# Altium PCB 智能语音风扇.PcbDoc
Units mm, origin at the board's own origin, x right, y up, seen from the top; angles counter-clockwise.
Board outline 242.7 x 171.7 mm, 2 copper layers (Top Layer, Bottom Layer); 25 components, 41 nets, 117 pads, 0 vias.
Unrouted connection lines stored in the file: 61.
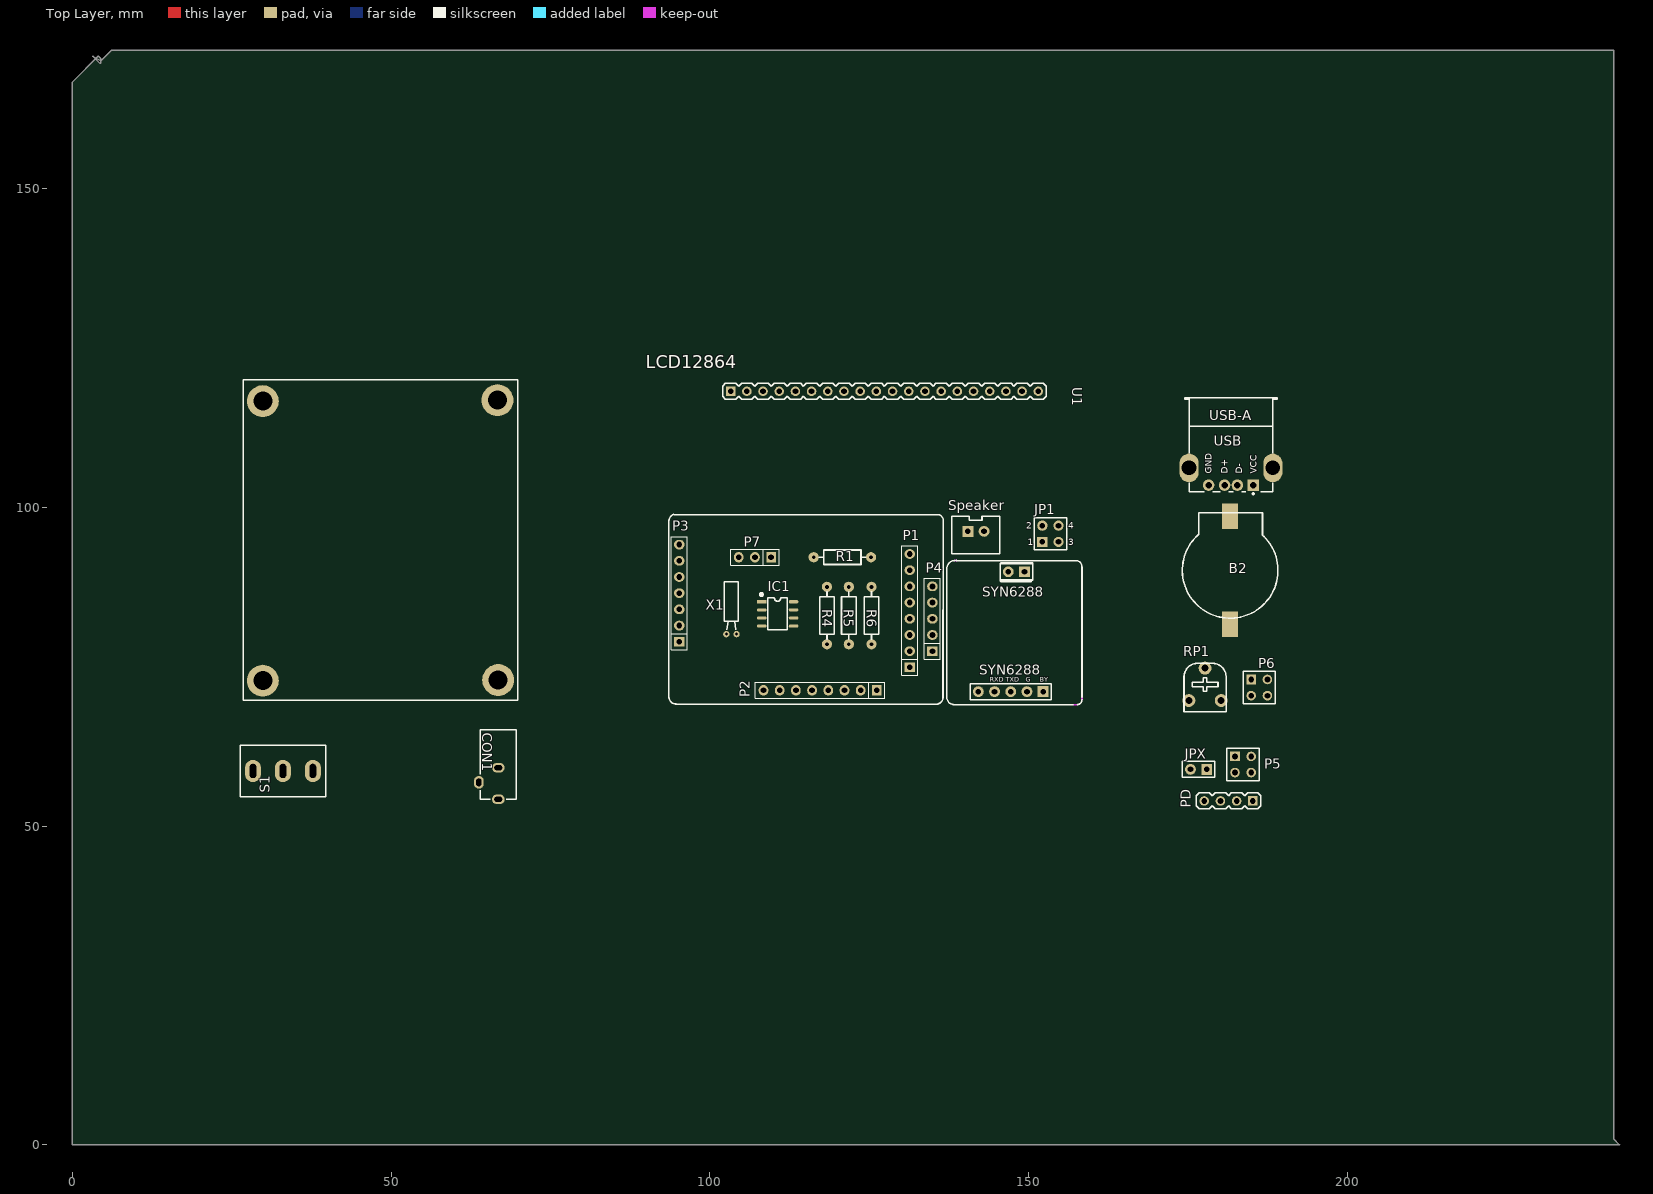
[diagram p0: Top Layer view]
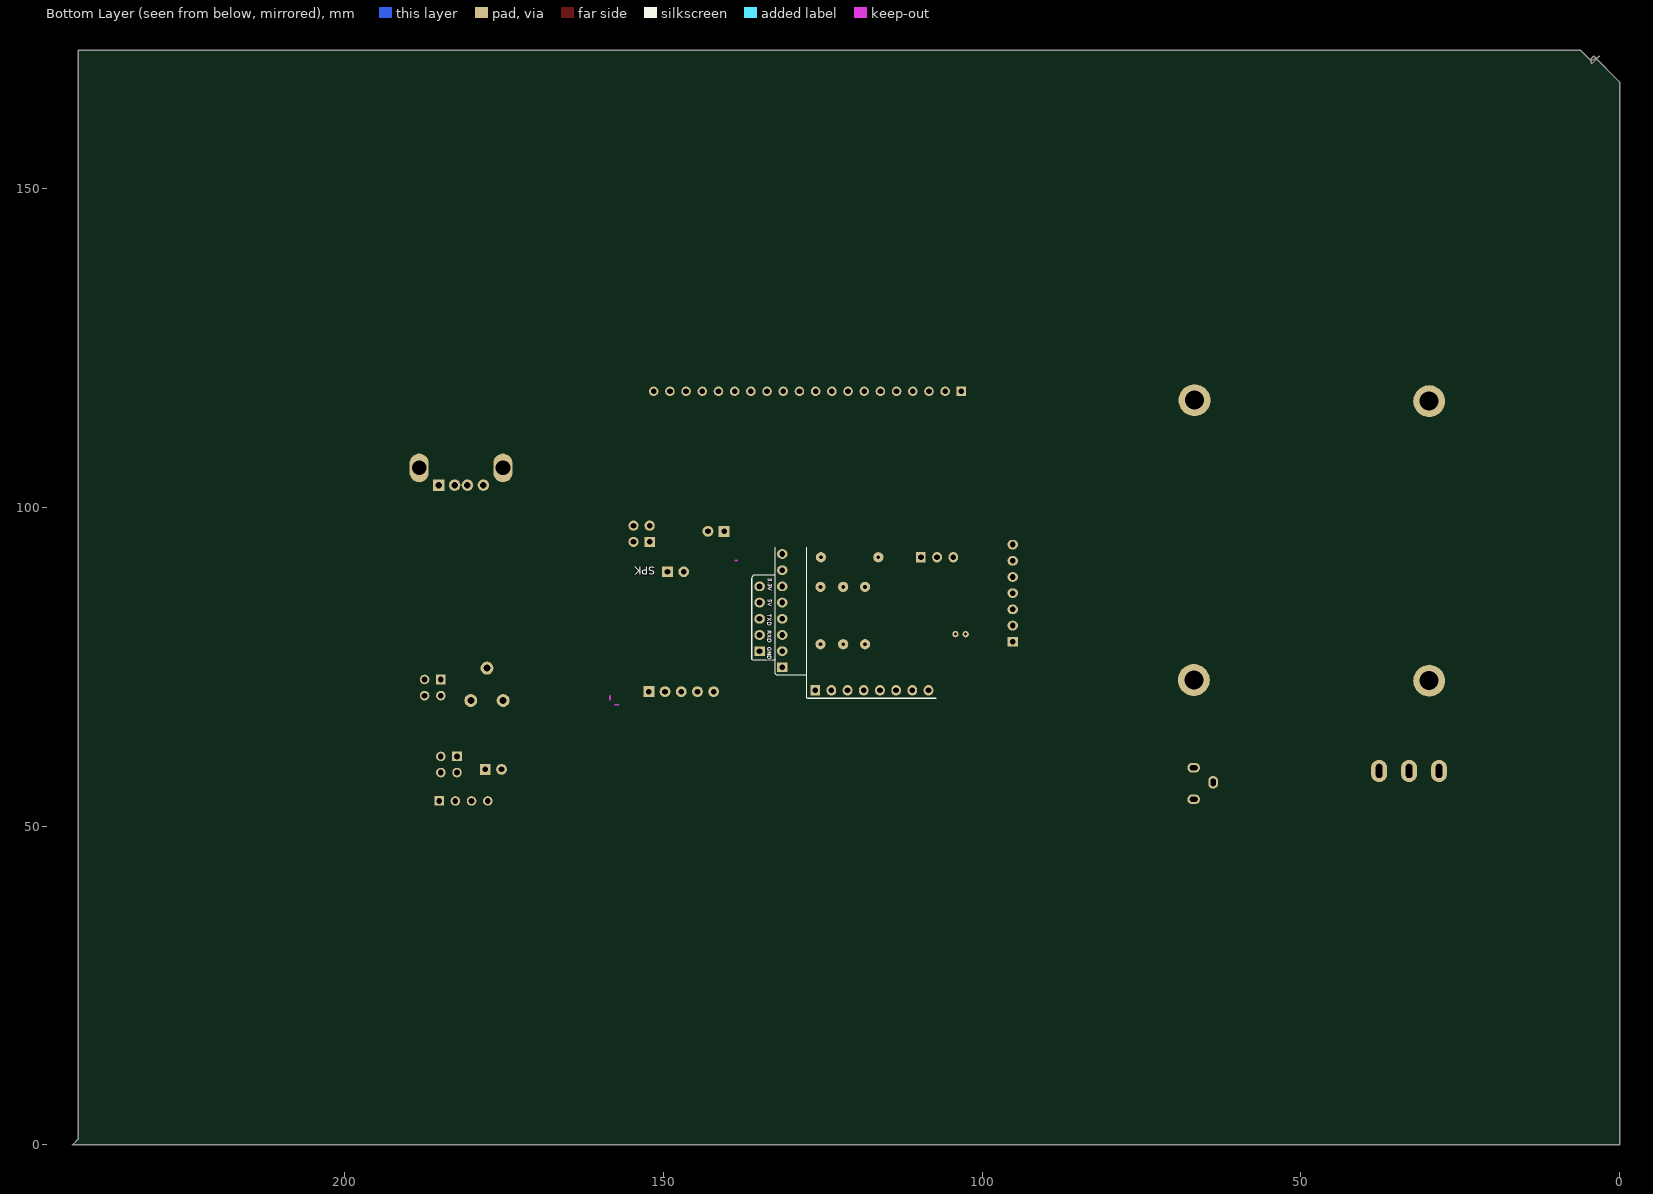
[diagram p1: Bottom Layer view, seen from below]

## Layer stack, top to bottom
Top Layer: signal copper 0.0356
Dielectric: dielectric 0.32, FR-4, Dk 4.8
Bottom Layer: signal copper 0.0356

## Board outline
4.445,170.053 6.096,171.704 241.808,171.704 241.808,0.889 242.697,0 0,0 0,166.751 4.064,170.815 4.445,170.434 4.445,169.672 4.318,169.672 3.175,170.815

## Design rules (kind name [scope] priority, off if disabled: settings)
Clearance [All] p1: gap=0.254
PolygonConnect [All] p1: connectstyle=Relief reliefconductorwidth=0.254 reliefentries=4 polygonreliefangle="90 Angle"
RoutingVias [All] p1: holewidth=0.711 width=1.27 viastyle="Through Hole" minholewidth=0.711 minwidth=1.27 maxholewidth=0.711 maxwidth=1.27
SilkscreenOverComponentPads [All] p1: minsilkscreentomaskgap=0.254
SolderMaskExpansion [All] p1: expansion=0.102
Width [All] p1: maxlimit=0.254 minlimit=0.254 preferedwidth=0.254
27 further rules are at their usual default settings.

## Components (designator, comment, footprint, x,y, rotation, side; value= is the part's Value field where it differs from the comment)
B2 "Battery" BAT-CR1220 181.61,90.17 r90 top
CON1 "3.5*1.3" DC-002 66.802,54.229 r270 top
IC1 "DS1302" SOP8_L 110.617,83.312 r0 top
JP1 "Header2X2" HDR2.54-LI-2x2P 153.416,95.885 r0 top
JPX "HDR-1X2" HDR2.54-LI-2P 176.657,58.928 r180 top
P1 "Pin 8" HDRS2.54-1X8 131.343,74.93 r90 top
P2 "Pin 8" HDRS2.54-1X8 126.187,71.323 r180 top
P3 "Pin 7" HDRS2.54-1X7 95.199,78.943 r90 top
P4 "Pin 5" HDRS2.54-1X5 134.899,77.47 r90 top
P5 "Header 2X2A" HDR2X2_A 182.372,60.96 r0 top
P6 "Header 2X2A" HDR2X2_A 184.912,73.025 r0 top
P7 "DS18B20" HDRS2.54-1X3 109.601,92.202 r180 top
PD "Pin 4" HDR2.54-1X4 185.166,53.975 r180 top
R1 "4.7K" "RS 1/4W" 120.777,92.202 r0 top
R4 "10K" "RS 1/4W" 118.364,83.058 r270 top
R5 "10K" "RS 1/4W" 121.793,83.058 r270 top
R6 "10K" "RS 1/4W" 125.349,83.058 r270 top
RP1 "10K" RM065 177.673,74.803 r0 top
S1 "MTS-10x" MTS-10x 33.02,58.674 r180 top
Speaker "HDR-1X2" XH2.54-LI-2P 141.732,96.266 r0 top
SYN6288 "HDR-1X2" HDR2.54-M-LI-2P 148.082,89.916 r180 top
SYN6288 "HDR-1X5" HDR2.54-M-LI-5P 147.193,71.12 r180 top
U1 "LCD12864" HDR2.54-1X20 103.251,118.237 r0 top
USB "USB" USB-A/S_A 181.737,103.505 r90 top
X1 "32768Hz" OSC-2x6-WI-A 103.378,80.137 r0 top

## Footprints (in the part's own frame and the unit in brackets; to place one, negate y for a bottom-side part, rotate by r counter-clockwise, add the part's x,y. Pads: shape width x height; smd on the part's side, far side on the other; paste and mask are expansions set on the pad)
BAT-CR1220 [mm]
  rect 4x2.5 smd: 1(8.484,0) 2(-8.484,0)
  silkscreen extent -7.52,-7.5 9.02,7.5, body extent -9.02,-7.62 9.48,7.38, height 4.94
DC-002 [mm]
  oval 1.5x2 hole 0.8 slot 1.2 at 90 deg: 1(0,0) 2(-4.953,0)
  oval 2x1.5 hole 0.8 slot 1.2 at 0 deg: 3(-2.667,-3.048)
  silkscreen extent -10.92,-2.79 0,2.79, body extent -10.92,-2.79 0,2.79, height 7.2
HDR2.54-1X4 [mm]
  rect 1.5x1.5 hole 0.9: 1(0,0)
  round 1.5 hole 0.9: 2(2.54,0) 3(5.08,0) 4(7.62,0)
  silkscreen extent -1.27,-1.25 8.89,1.25, body extent -1.27,-1.25 8.89,1.25, height 8.54
HDR2.54-1X20 [mm]
  rect 1.5x1.5 hole 0.9: 1(0,0)
  round 1.5 hole 0.9: 2(2.54,0) 3(5.08,0) 4(7.62,0) 5(10.16,0) 6(12.7,0) 7(15.24,0) 8(17.78,0) 9(20.32,0) 10(22.86,0) 11(25.4,0) 12(27.94,0) 13(30.48,0) 14(33.02,0) 15(35.56,0) 16(38.1,0) 17(40.64,0) 18(43.18,0) 19(45.72,0) 20(48.26,0)
  silkscreen extent -1.27,-1.25 49.53,1.25, body extent -1.27,-1.25 49.53,1.25, height 8.54
HDR2.54-LI-2P [mm]
  rect 1.7x1.7 hole 0.9: 1(-1.27,0)
  round 1.7 hole 0.9: 2(1.27,0)
  silkscreen extent -2.54,-1.27 2.54,1.27, body extent -2.54,-1.27 2.54,1.27, height 8.5
HDR2.54-LI-2x2P [mm]
  rect 1.6x1.6 hole 0.9: 1(-1.27,-1.27)
  round 1.6 hole 0.9: 2(-1.27,1.27) 3(1.27,-1.27) 4(1.27,1.27)
  silkscreen extent -2.54,-2.54 2.54,2.54, body extent -2.54,-2.54 2.54,2.54, height 8.5
HDR2.54-M-LI-2P [mm]
  rect 1.7x1.7 hole 0.9: 1(-1.27,0)
  round 1.7 hole 0.9: 2(1.27,0)
  silkscreen extent -2.54,-1.27 2.54,1.27, body extent -2.54,-1.27 2.54,1.27, height 8.5
HDR2.54-M-LI-5P [mm]
  rect 1.7x1.7 hole 0.9: 1(-5.08,0)
  round 1.7 hole 0.9: 2(-2.54,0) 3(0,0) 4(2.54,0) 5(5.08,0)
  silkscreen extent -6.35,-1.27 6.35,1.27, body extent -6.35,-1.27 6.35,1.27, height 8.5
HDR2X2_A [mm]
  rect 1.5x1.5 hole 0.9: 1(0,0)
  round 1.5 hole 0.9: 2(2.54,0) 3(2.54,-2.54) 4(0,-2.54)
  silkscreen extent -1.27,-3.81 3.81,1.27
HDRS2.54-1X3 [mil]
  rect 60x65 hole 35.43: 1(0,0)
  oval 60x65 hole 35.43: 2(100,0) 3(200,0)
  silkscreen extent -50,-50 250,50, body extent -55,-50 255,48, height 335
HDRS2.54-1X5 [mil]
  rect 60x65 hole 35.43: 1(0,0)
  oval 60x65 hole 35.43: 2(100,0) 3(200,0) 4(300,0) 5(400,0)
  silkscreen extent -50,-50 450,50, body extent -55,-50 455,48, height 335
HDRS2.54-1X7 [mil]
  rect 60x65 hole 35.43: 1(0,0)
  oval 60x65 hole 35.43: 2(100,0) 3(200,0) 4(300,0) 5(400,0) 6(500,0) 7(600,0)
  silkscreen extent -50,-50 650,50, body extent -55,-50 655,48, height 335
HDRS2.54-1X8 [mil]
  rect 60x65 hole 35.43: 1(0,0)
  oval 60x65 hole 35.43: 2(100,0) 3(200,0) 4(300,0) 5(400,0) 6(500,0) 7(600,0) 8(700,0)
  silkscreen extent -50,-50 750,50, body extent -55,-50 755,48, height 335
MTS-10x [mm]
  oval 2.5x3.5 hole 1 slot 2.2 at 90 deg unplated: 1(-4.7,0) 2(0,0) 3(4.7,0)
  silkscreen extent -6.73,-4.06 6.73,4.06, body extent -6.6,-3.95 6.6,3.95, height 30.47
OSC-2x6-WI-A [mm]
  round 1 hole 0.5: 1(0.8,0) 2(-0.8,0)
  silkscreen extent -1.1,0.7 1.07,8.2, body extent -1,-0.16 1,8, height 2.05
RM065 [mil]
  round 80 hole 43.31: 1(-100,-200) 2(0,0) 3(100,-200)
  silkscreen extent -130,-270 130,30, body extent -128,-269 128,30, height 299
"RS 1/4W" [mm]
  round 1.6 hole 0.6: 1(-4.5,0) 2(4.5,0)
  silkscreen extent -3.68,-1.14 3.68,1.14, body extent -4.72,-1.16 4.73,1.16, height 2.32
SOP8_L [mm]
  rect 1.5x0.5 smd: 1(-2.5,1.905)
  oval 1.5x0.5 smd: 2(-2.5,0.635) 3(-2.5,-0.635) 4(-2.5,-1.905) 5(2.5,-1.905) 6(2.5,-0.635) 7(2.5,0.635) 8(2.5,1.905)
  silkscreen extent -2.69,-2.5 1.52,3.2, body extent -3,-2.5 3,2.5, height 1.9
USB-A/S_A [mm]
  rect 1.8x1.8 hole 1: 1(0,-3.5)
  round 1.8 hole 1: 2(0,-1) 3(0,1) 4(0,3.5)
  oval 4.5x3 hole 2.3: 4(2.71,6.57) 4(2.71,-6.57)
  silkscreen extent -1.47,-7.25 13.75,7.25, body extent -0.6,-7.34 13.7,7.34, height 6.8
XH2.54-LI-2P [mm]
  rect 1.7x1.7 hole 0.9: 1(-1.27,0)
  round 1.7 hole 0.9: 2(1.27,0)
  silkscreen extent -3.81,-3.51 3.74,2.37, body extent -3.77,-3.3 3.77,2.4, height 7.05

## Free pads (board coordinates)
  round 5 hole 3: 0(29.875,72.84) 0(29.875,116.69) 0(66.675,116.84) 0(66.775,72.94)

## Nets (pads, with @x,y where several pads share a name; then routed paths per layer and width w, separated by ;. In a path a pad name is that pad's centre, name@x,y a point inside that pad or via, vN(x,y) a via of type N, cw(c..) or ccw(c..) an arc to the next point about the centre after c; other vN are vias at no path point)
3.3V: P4.5 PD.4 SYN6288.5
12V: CON1.2
GND: B2.2 IC1.4 P4.1 P5.2 P5.3 P7.3 PD.1 U1.1 U1.20
LINL: P3.5
LINR: P3.4
MICNIN: P3.6
MICP: P3.7
MONO: P3.1
NetB2_1: B2.1 IC1.8
NetCON1_1: CON1.1 S1.1
NetIC1_2: IC1.2 X1.2
NetIC1_3: IC1.3 X1.1
NetP5_4: P5.4 S1.2
NetP6_3: P6.3 USB.4
NetP6_4: P6.4 USB.1
NetRP1_2: RP1.2 U1.3
NetRP1_3: RP1.3 U1.18
NetSpeaker_1: Speaker.1 SYN6288.1@152.273,71.12
NetSpeaker_2: Speaker.2 SYN6288.2@149.733,71.12
P10: P1.8 U1.7
P11: P1.7 U1.8
P12: P1.6 U1.9
P13: P1.5 U1.10
P14: P1.4 U1.11
P15: P1.3 U1.12
P16: P1.2 U1.13
P17: P1.1 U1.14
P23: IC1.6 P2.3 R5.2
P24: IC1.7 P2.4 R4.2
P25: P2.5 U1.6
P26: P2.6 U1.5
P27: P2.7 U1.4
P33: IC1.5 P2.2 R6.2
P34: JPX.1 JPX.2 P2.1
P41: P2.8 P7.2 R1.1
RXD: JP1.1 P4.2 PD.2
SPON: P3.3
SPOP: P3.2
SYNRXD: JP1.4 SYN6288.4
TXD: JP1.3 P4.3 PD.3
VCC: IC1.1 P4.4 P5.1 P7.1 R1.2 R4.1 R5.1 R6.1 RP1.1 U1.2 U1.15 U1.17 U1.19
pads on no net: CON1.3 JP1.2 P6.1 P6.2 S1.3 SYN6288.1@149.352,89.916 SYN6288.2@146.812,89.916 SYN6288.3 U1.16 USB.2 USB.3

## Keep-outs
Keep-Out Layer:
  lines w0.254: 138.43,91.694 138.684,91.694 ; 156.972,69.088 157.607,69.088 ; 158.369,69.85 158.369,70.485

## Silkscreen, mask and mechanical layers (free items; w line width, h text height)
Top Overlay:
  lines w0.254: 93.548,70.053 93.548,97.866 ; 93.571,97.867 cw(c94.66,97.883) 94.3,98.911 ; 93.59,70.172 ccw(c94.674,70.276) 94.691,69.187 ; 94.31,98.882 135.712,98.882 ; 94.564,69.164 135.839,69.164 ; 135.585,69.164 ccw(c135.481,70.248) 136.57,70.265 136.601,97.866 ccw(c135.683,97.967) 135.678,98.891 ; 138.43,91.694 ccw(c138.43,90.424) 137.16,90.424 137.16,89.789 137.16,87.757 137.16,70.231 ccw(c138.303,70.231) 138.303,69.088 139.7,69.088 156.972,69.088 ; 138.684,91.694 157.404,91.678 cw(c157.404,90.713) 158.369,90.713 158.369,90.17 158.369,70.231 ; 150.622,91.186 150.622,91.313 ; 157.607,69.088 ccw(c157.607,69.85) 158.369,69.85 ; 150.622,91.313 145.669,91.313 145.542,91.186 145.542,88.519 145.669,88.392 150.368,88.392 150.622,88.646 150.622,91.313 ; 26.775,69.765 26.775,120.065 69.875,120.065 69.875,69.765 26.775,69.765
  text "G" at 149.583,72.667 h0.76
  text "RXD" at 143.891,72.644 h0.76
  text "TXD" at 146.431,72.644 h0.76
  text "BY" at 151.765,72.644 h0.76
Bottom Overlay:
  lines w0.178: 107.163,70.002 127.381,70.002 127.483,70.104 127.483,75.184 ; 107.239,70.053 127.457,70.053 127.559,70.155 ; 127.483,73.939 127.483,93.751 ; 127.635,73.66 130.429,73.66 132.182,73.66 132.41,73.889 132.41,93.777 ; 130.505,73.711 132.258,73.711 ; 132.41,76.2 132.588,76.022 135.966,76.022 ; 132.436,89.408 135.865,89.408 136.093,89.179 136.093,88.849 136.093,76.149 ; 136.169,76.2 136.169,88.9
  text "SPK" at 151.257,90.678 h1.27 r180
  text "3.3V" at 133.655,88.951 h0.64 r90
  text "3.3V" at 133.579,88.9 h0.64 r90
  text "5V" at 133.655,85.649 h0.64 r90
  text "5V" at 133.579,85.598 h0.64 r90
  text "TXD" at 133.706,83.287 h0.64 r90
  text "TXD" at 133.629,83.236 h0.64 r90
  text "RXD" at 133.68,80.747 h0.64 r90
  text "RXD" at 133.604,80.696 h0.64 r90
  text "GND" at 133.68,78.13 h0.64 r90
  text "GND" at 133.604,78.08 h0.64 r90

## Text inside footprints (layer, text, board x,y; h text height)
JP1: Top Overlay "3" at 156.21,94.107 h1.02; Top Overlay "4" at 156.21,96.647 h1.02; Top Overlay "2" at 149.606,96.647 h1.02; Top Overlay "1" at 149.86,94.107 h1.02
USB: Top Overlay "GND" at 178.689,105.283 h1.02 r90; Top Overlay "D+" at 181.229,105.283 h1.02 r90; Top Overlay "D-" at 183.515,105.283 h1.02 r90; Top Overlay "VCC" at 185.801,105.283 h1.02 r90; Top Overlay "USB-A" at 178.307,113.715 h1.52